# EAGLE board pre_amplifier (EAGLE 9.3.0)
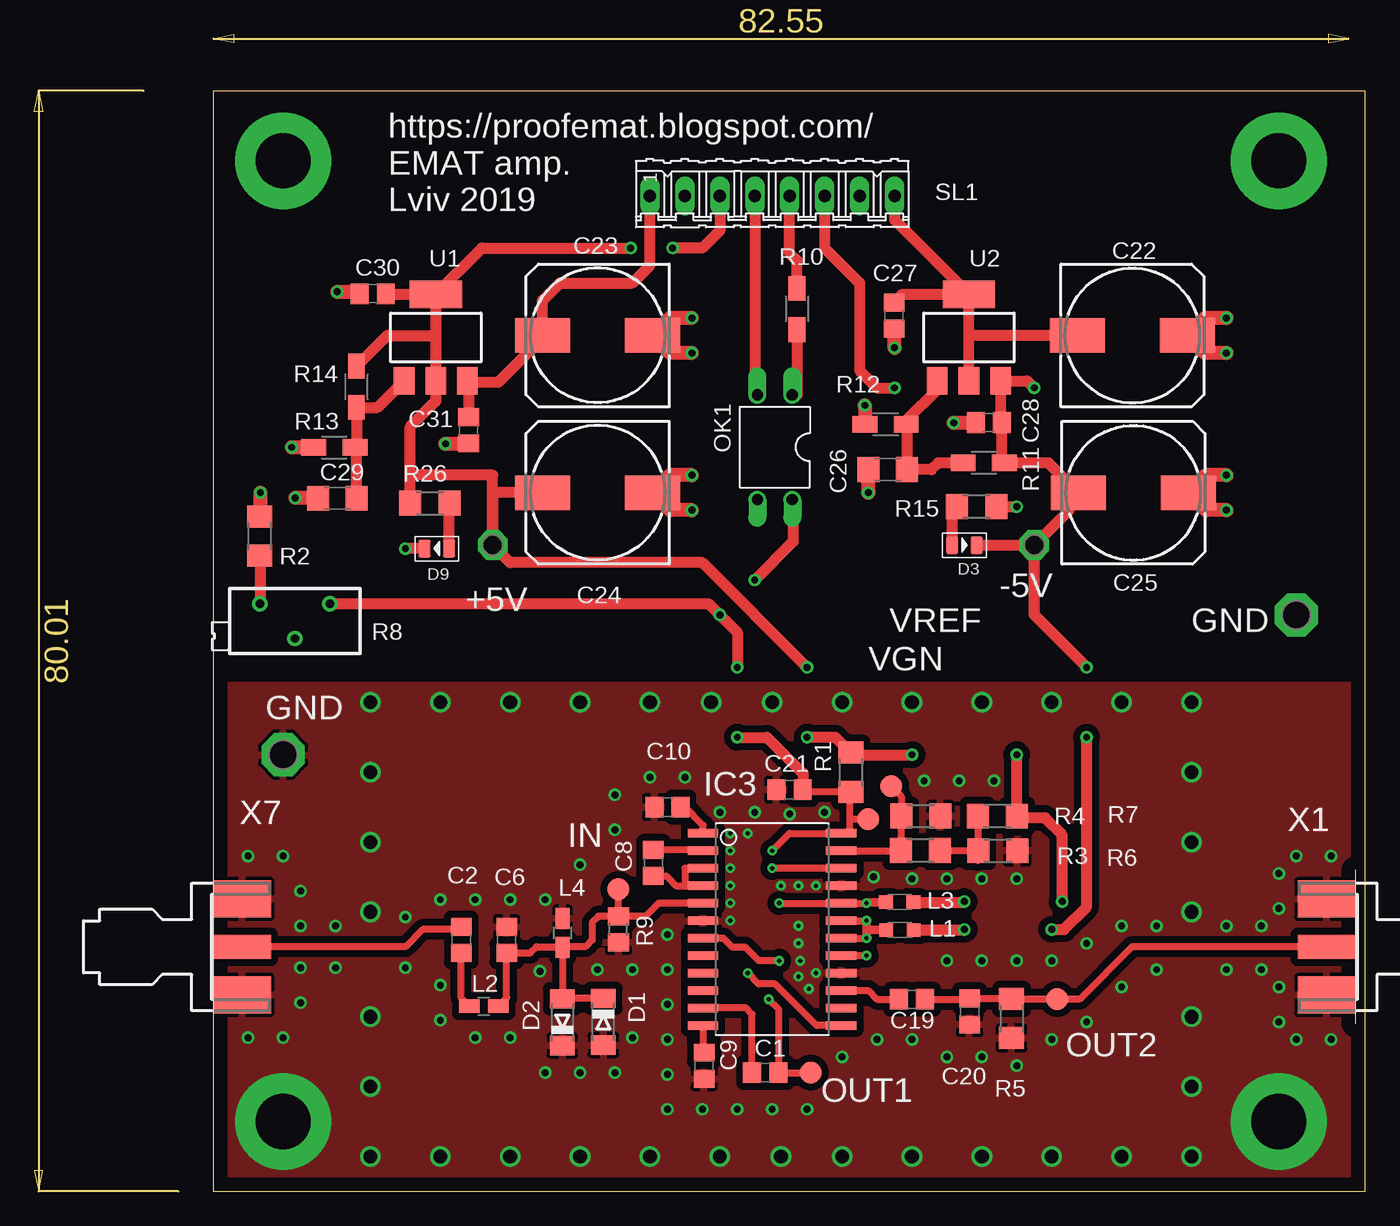
[diagram p0: board, top side]
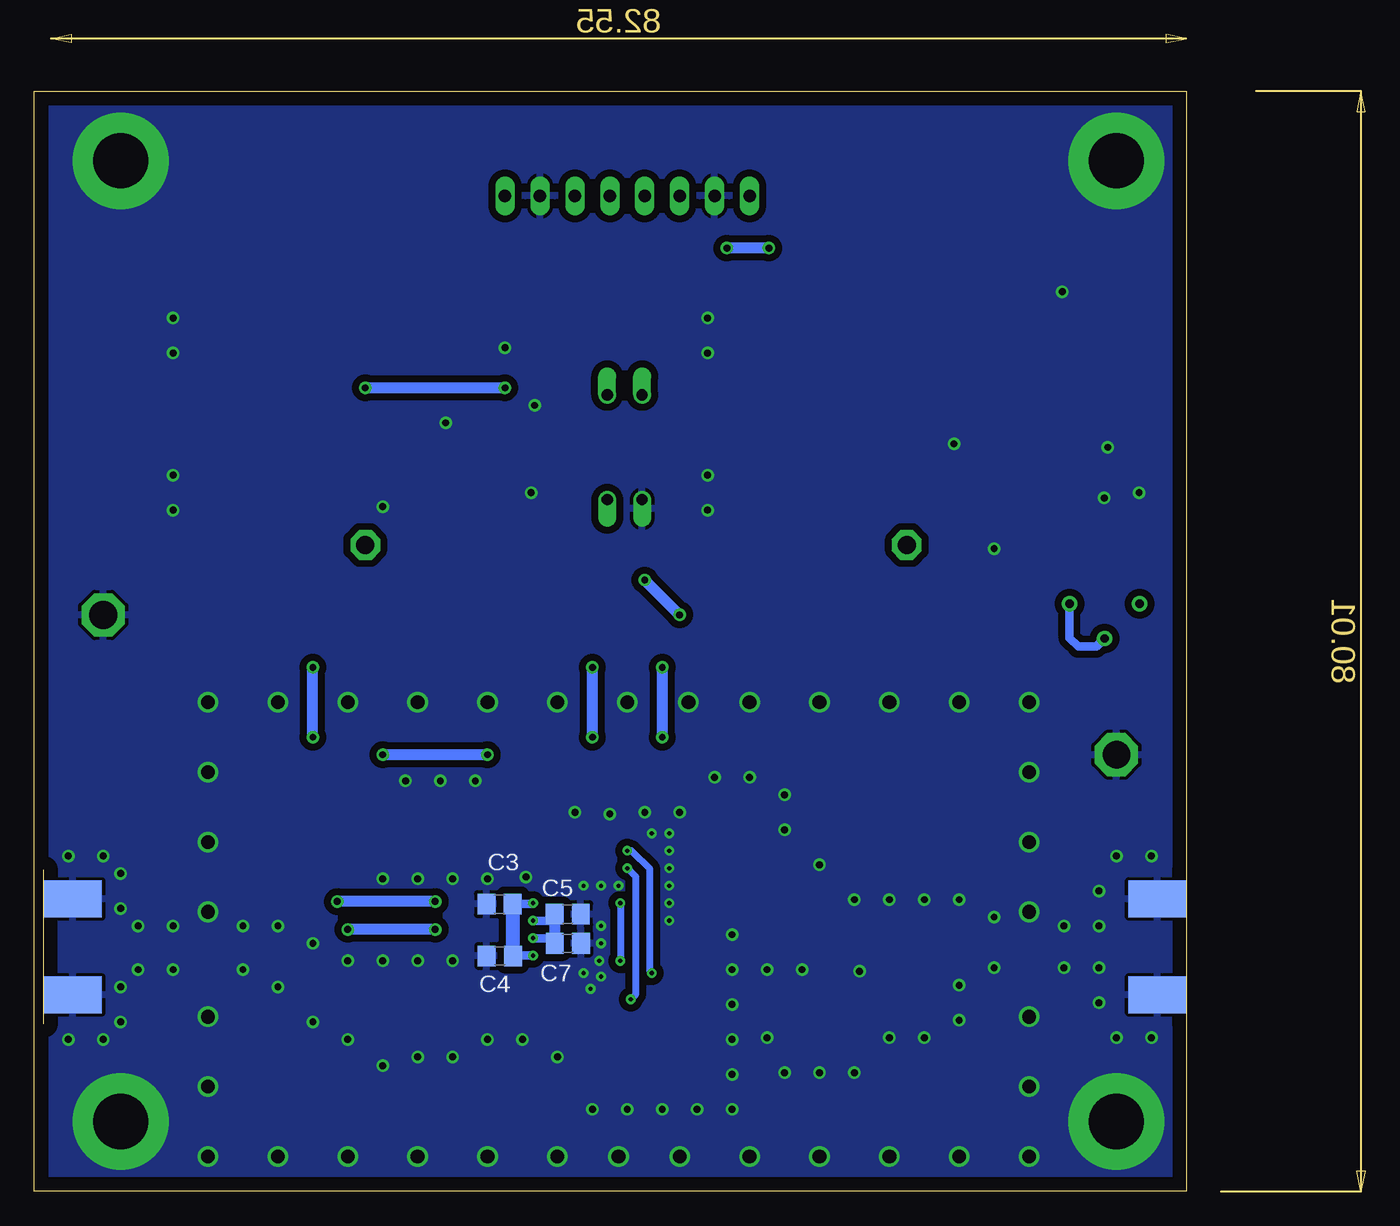
[diagram p1: board, bottom side, seen from below]

Size 83.74 x 80 mm. Coordinates in mm from the lower left corner, seen from the top.
Outline: 0,0 83.74,0 83.74,80 0,80 0,0
Copper layers (1*16): Top 0.035mm / dielectric 1.5mm / Bottom 0.035mm
Design rules "default *": minimum track width 0.3mm, minimum drill 10mil, track to track 8mil, track to pad 8mil, pad to pad 8mil, via to via 8mil, smd to smd 8mil, copper to edge 40mil, drill to drill 8mil, minimum pad ring 10mil, minimum via ring 8mil, stop-mask expansion 4mil, vias tented up to drill 0mil, thermal gap 10mil
Net classes: 0 default: width 0.3 mm, drill 0.3 mm, clearance 0.508 mm; 1 power: width 0.61 mm, drill 0.5 mm, clearance 0.508 mm to class 0, clearance 0.508 mm

## Footprints (pad centres in the part's own frame; a part is rotated, then mirrored left to right if it is on the bottom)
C0805 = smd 1.3 x 1.5: 1 -0.95,0; 2 0.95,0
153CLV-1010 = smd 4 x 2.5: + 4,0; - -4,0
C1206 = smd 1.6 x 1.8: 1 -1.4,0; 2 1.4,0
MINIMELF = smd 1.4 x 1.8: A 1.7,0; C -1.7,0
LED-0805 = smd 0.889 x 1.27: + -0.889,0; - 0.889,0
SO24L = smd 0.61 x 2.21: 1 -6.985,-5.029; 2 -5.715,-5.029; 3 -4.445,-5.029; 4 -3.175,-5.029; 5 -1.905,-5.029; 6 -0.635,-5.029; 7 0.635,-5.029; 8 1.905,-5.029; 9 3.175,-5.029; 10 4.445,-5.029; 11 5.715,-5.029; 12 6.985,-5.029; 13 6.985,5.029; 14 5.715,5.029; 15 4.445,5.029; 16 3.175,5.029; 17 1.905,5.029; 18 0.635,5.029; 19 -0.635,5.029; 20 -1.905,5.029; 21 -3.175,5.029; 22 -4.445,5.029; 23 -5.715,5.029; 24 -6.985,5.029
L2012C = smd 1 x 1: 1 -1,0; 2 1,0
L0805W = smd 1.5 x 1: 1 -1.052,0; 2 1.052,0
DIL04 = drill 0.813 offset: 1 -1.27,-3.81; 2 1.27,-3.81; 3 1.27,3.81; 4 -1.27,3.81
R1206 = smd 1.6 x 1.803: 1 -1.422,0; 2 1.422,0
RTRIMT93XB = drill 0.61: 1 1.27,-2.54; 2 -1.27,0; 3 1.27,2.54
R0805 = smd 1.3 x 1.5: 1 -0.95,0; 2 0.95,0
R1206W = smd 1.8 x 1.2: 1 -1.499,0; 2 1.499,0
08P = drill 0.914 long: 1 -8.89,0; 2 -6.35,0; 3 -3.81,0; 4 -1.27,0; 5 1.27,0; 6 3.81,0; 7 6.35,0; 8 8.89,0
P1-13 = drill 1.321 pad 2.159 octagon: TP 0,0
TP16R = smd 1.6 x 1.6: TP 0,0
P1-20 = drill 2.007 pad 3.15 octagon: TP 0,0
SOT223 = smd 1.5 x 2: 1 -2.3,-3.15; 2 0,-3.15; 3 2.3,-3.15 | smd 3.8 x 2: 4 0,3.15
J502-ND-142-0711-821/826 = smd 4.191 x 1.778: 1 2.115,0 | smd 4.191 x 2.667: G@1 2.115,3.495; G@2 2.115,-3.495 | smd 4.191 x 2.667 bottom: G@3 2.115,3.495; G@4 2.115,-3.495

## Placement (x,y rotation side)
C1  100nF  [C0805]  40.13,8.64 0 top
C2  2.4nF  [C0805]  18.03,18.29 270 top
C3  100nF  [C0805]  49.93,20.89 180 bottom
C4  100nF  [C0805]  49.91,17.12 180 bottom
C5  100nF  [C0805]  44.97,20.16 180 bottom
C6  12nF  [C0805]  21.34,18.29 270 top
C7  100nF  [C0805]  44.96,18.03 180 bottom
C8  100nF  [C0805]  32,23.88 270 top
C9  100nF  [C0805]  35.69,9.14 270 top
C10  100nF  [C0805]  33.02,27.94 0 top
C19  100nF  [C0805]  50.8,13.97 180 top
C20  5pF  [C0805]  54.99,13.08 270 top
C21  100pF  [C0805]  41.91,29.21 180 top
C22  220uF 16V  [153CLV-1010]  66.83,62.23 0 top
C23  220uF 16V  [153CLV-1010]  27.94,62.23 180 top
C24  470uF 6.3V  [153CLV-1010]  27.94,50.8 180 top
C25  470uF 6.3V  [153CLV-1010]  66.9,50.8 0 top
C26  10uF  [C1206]  49.04,52.48 180 top
C27  100nF  [C0805]  49.5,63.67 270 top
C28  1uF  [C0805]  56.39,55.89 180 top
C29  10uF  [C1206]  9.03,50.39 0 top
C30  1uF  [C0805]  11.6,65.27 0 top
C31  100nF  [C0805]  18.57,55.34 90 top
D1  1N4148  [MINIMELF]  28.37,12.33 270 top
D2  1N4148  [MINIMELF]  25.39,12.3 90 top
D3  -5V  [LED-0805]  54.61,46.99 0 top
D9  +5V  [LED-0805]  16.26,46.74 180 top
IC3  [SO24L]  40.64,19.05 270 top
L1  BLM21PG221SN1D  [L2012C]  49.93,19 180 top
L2  10uH  [L0805W]  19.67,13.47 0 top
L3  BLM21PG221SN1D  [L2012C]  49.91,21.03 180 top
L4  2.2uH  [L0805W]  25.4,18.8 90 top
OK1  PC817  [DIL04]  40.83,54.11 180 top
R1  20K  [R1206]  46.35,30.48 90 top
R2  1K  [R1206]  3.39,47.64 270 top
R3  5.1K  [R1206]  51.42,24.78 0 top
R4  47K  [R1206]  51.45,27.3 180 top
R5  510  [R1206]  58.04,12.57 90 top
R6  10K  [R1206]  57.04,24.78 180 top
R7  5.1K  [R1206]  57.01,27.28 0 top
R8  20K  [RTRIMT93XB]  5.95,41.47 90 top
R9  51  [R0805]  29.46,19.05 90 top
R10  510  [R1206W]  42.44,64.15 270 top
R11  240  [R1206W]  56.02,52.97 180 top
R12  720  [R1206W]  48.88,55.77 180 top
R13  720  [R1206W]  8.81,54.09 0 top
R14  240  [R1206W]  10.43,58.5 90 top
R15  1K  [R1206]  55.5,49.78 0 top
R26  1K  [R1206]  15.75,50.04 180 top
SL1  [08P]  40.64,72.39 0 top
TP1  TPSQPAD1-13  [P1-13]  20.32,46.99 180 top
TP2  TPSQPAD1-13  [P1-13]  59.69,46.99 0 top
TP3  TPSQTP16R  [TP16R]  47.62,27.05 0 top
TP4  TPSQTP16R  [TP16R]  49.28,29.46 0 top
TP5  TPSQTP16R  [TP16R]  43.43,8.64 0 top
TP6  TPSQTP16R  [TP16R]  61.34,13.97 0 top
TP7  TPSQTP16R  [TP16R]  29.46,21.97 180 top
TP8  TPSQPAD1-20  [P1-20]  78.74,41.91 0 top
TP9  TPSQPAD1-20  [P1-20]  5.08,31.75 0 top
U1  LM317DCY  [SOT223]  16.18,62.08 0 top
U2  LM337IMP  [SOT223]  54.94,62.08 0 top
X1  SMA-142-0711-821/826  [J502-ND-142-0711-821/826]  83.06,17.78 180 top
X7  SMA-142-0711-821/826  [J502-ND-142-0711-821/826]  0,17.78 0 top

## Library data of the parts
C1-C10 C19-C21 C27 C28 C30 C31 R1-R7 R9-R15 R26 = resistor
C22-C25 = rcl; SPICEPREFIX: C
C26 C29 = resistor; PACKAGE: 1206
D1 D2 = diode
D3 D9 = Seeed-LED; MPN: 17-215SYGC/S530-E2/TR8
IC3 = burr-brown; MF: TEXAS INSTRUMENTS; MPN: ADS1213U; OC_FARNELL: 1234905; OC_NEWARK: 35C1517
L1 L3 = rcl; SPICEPREFIX: L
L2 L4 = rcl
OK1 = optocoupler; MPN: PC817X4J000F; OC_FARNELL: 9707727; OC_NEWARK: 97K7059
R8 = rcl; SPICEMODEL: X; SPICEPREFIXL: POT
SL1 = con-amp-quick; OC_FARNELL: unknown; OC_NEWARK: unknown
TP1 = testpad; TP_SIGNAL_NAME: +5V
TP2 = testpad; TP_SIGNAL_NAME: -5V
TP3 = testpad; TP_SIGNAL_NAME: VGN
TP4 = testpad; TP_SIGNAL_NAME: VREF
TP5 = testpad; TP_SIGNAL_NAME: OUT1
TP6 = testpad; TP_SIGNAL_NAME: OUT2
TP7 = testpad; TP_SIGNAL_NAME: IN
TP8 TP9 = testpad; TP_SIGNAL_NAME: GND
U1 U2 = modified-v-reg
X1 X7 = con-coax; MF: JOHNSON COMPONENTS; MPN: 142-0711-821; OC_FARNELL: 1019328; OC_NEWARK: 16F3627

## Nets
+5V: C24.+ C30.2 L3.1 R1.2 R7.2 R14.2 R26.2 SL1.3 TP1.TP U1.2 U1.4
+9V [power]: C23.+ C31.2 SL1.1 U1.3
-5V: C25.- C28.1 D3.- L1.1 R11.1 SL1.6 TP2.TP U2.3
-9V [power]: C22.- C27.1 SL1.8 U2.2 U2.4
GND [power]: C3.2 C4.2 C5.1 C6.1 C7.1 C9.2 C10.1 C20.2 C21.2 C22.+ C23.- C24.- C25.+ C26.2 C27.2 C28.2 C29.1 C30.1 C31.1 D1.A D2.C D9.- IC3.6 IC3.16 IC3.21 L4.2 OK1.3 R2.1 R4.1 R5.1 R6.1 R9.1 R12.2 R13.1 R15.2 SL1.2 SL1.7 TP8.TP TP9.TP X1.G@1 X1.G@2 X1.G@3 X1.G@4 X7.G@1 X7.G@2 X7.G@3 X7.G@4
N$1: C21.1 IC3.13 IC3.24 OK1.4 R1.1 R8.1 R8.2 TP3.TP
N$2: C9.1 IC3.12
N$3: C6.2 D1.C D2.A IC3.5 L2.2 L4.1 R9.2 TP7.TP
N$4: C19.1 C20.1 R5.2 TP6.TP X1.1
N$5: IC3.23 R3.1 R4.2 TP4.TP
N$6: C1.2 IC3.22 TP5.TP
N$7: C8.2 IC3.3 IC3.4
N$8: C1.1 IC3.11
N$9: C8.1 IC3.2
N$10: C2.1 X7.1
N$11: R2.2 R8.3
N$12: R3.2 R6.2 R7.1
N$13: C26.1 R11.2 R12.1 U2.1
N$14: C10.2 IC3.1
N$15: C2.2 L2.1
N$16: C29.2 R13.2 R14.1 U1.1
N$17: OK1.1 R10.2
N$18: C19.2 IC3.15
N$19: R10.1 SL1.5
N$20: OK1.2 SL1.4
N$21: D3.+ R15.1
N$27: D9.+ R26.1
V+: C3.1 C4.1 IC3.7 IC3.17 IC3.20 L3.2
V-: C5.2 C7.2 IC3.18 IC3.19 L1.2

## Tracks (layer width: path | path; a pad name or v marks a point on that pad's centre or on a via)
+5V  (via drill 0.5)
  Top 0.8: v50.8,31.75 46.51,31.75 R1.2 45.24,33.02 v43.18,33.02 | R7.2 58.55,27.16 | v58.42,31.75 58.42,27.16 58.55,27.16 | L3.1 54.56,21.03 v54.61,21.08 | v61.72,21.08 61.72,25.91 60.47,27.16 58.55,27.16 | C24.+ 20.32,50.8 TP1.TP | R26.2 14.33,52.07 | 14.33,52.07 14.33,55.6 16.18,57.45 U1.2 16.18,62.23 | TP1.TP 20.32,52.07 14.33,52.07 | U1.4 16.18,62.23 | R14.2 12.66,62.23 16.18,62.23 | U1.4 19.53,68.58 v30.35,68.58 | SL1.3 36.83,69.85 35.56,68.58 v33.4,68.58 | v43.18,38.1 35.56,45.72 21.59,45.72 TP1.TP | C30.2 12.59,65.23 U1.4
  Bottom 0.8: v50.8,31.75 v58.42,31.75 | v54.61,21.08 v61.72,21.08 | v30.35,68.58 v33.4,68.58 | v43.18,33.02 v43.18,38.1
+9V
  Top 0.8: U1.3 18.57,58.84 | 18.57,58.84 C31.2 | 18.57,58.84 20.74,58.84 23.94,62.04 C23.+ 23.94,64.77 25.21,66.04 30.48,66.04 31.75,67.31 SL1.1
-5V  (via drill 0.5)
  Top 0.8: L1.1 54.56,19 v54.61,19.05 | v60.96,19.05 61.85,19.05 63.5,20.7 v63.5,33.02 | 57.34,55.69 C28.1 | D3.- TP2.TP | TP2.TP 62.23,49.53 62.23,50.8 C25.- 60.73,52.97 R11.1 57.34,53.15 57.34,55.69 | v63.5,38.1 59.69,41.91 TP2.TP | 57.34,55.69 57.24,55.79 U2.3 59.18,58.93 v59.69,58.42 | SL1.6 44.45,68.58 46.99,66.04 46.99,59.69 48.26,58.42 v49.53,58.42
  Bottom 0.8: v54.61,19.05 v60.96,19.05 | v63.5,33.02 v63.5,38.1 | v49.53,58.42 v59.69,58.42
-9V
  Top 0.8: SL1.8 49.53,70.64 U2.4 | C27.1 50.1,65.23 U2.4 | U2.2 54.94,62.23 | 54.94,62.23 U2.4 | C22.- 54.94,62.23
GND  (via drill 0.3, 0.5, 1, 4 pad 7)
  Top 0.8: R15.2 v58.42,49.78 | D9.- v13.97,46.74
  Top 1: v73.66,49.53 72.17,49.53 C25.+ 72.17,52.07 v73.66,52.07 | v47.62,50.8 47.64,50.81 C26.2 | v47.37,57.15 R12.2 | v53.85,55.88 55.43,55.88 C28.2 | v49.53,61.34 49.53,62.7 C27.2 | v34.8,63.5 33.21,63.5 C23.- 33.21,60.96 v34.8,60.96 | v73.66,60.96 72.1,60.96 C22.+ 72.1,63.5 v73.66,63.5 | v34.8,52.07 33.21,52.07 C24.- 33.21,49.53 v34.8,49.53 | v9.02,65.41 10.51,65.41 C30.1 | v5.71,54.1 7.3,54.1 R13.1 | v16.89,54.36 18.54,54.36 C31.1 | C29.1 7.6,50.42 v5.97,50.42 | v3.43,50.8 3.43,49.1 R2.1
  other vias: 5.08,74.93 5.08,5.08 77.47,5.08 43.81,15.88 43.31,14.73 42.55,18.03 42.55,19.3 42.67,16.76 43.81,22.23 41.27,22.23 42.55,22.23 37.59,19.68 42.55,15.62 37.59,20.95 37.59,22.23 37.59,23.5 37.59,24.77 37.59,26.04 38.86,26.04 48.01,22.86 50.8,22.73 53.34,22.73 55.88,22.73 58.42,22.73 58.42,16.76 55.88,16.76 53.34,16.76 60.96,16.76 63.5,18.03 66.04,19.3 68.58,19.3 73.66,19.3 76.2,19.3 76.2,16.13 73.66,16.13 68.58,16.13 66.04,14.86 63.5,12.32 60.96,11.05 58.42,9.14 55.88,9.78 53.34,9.78 50.8,11.05 48.26,11.05 45.72,9.78 43.18,5.97 40.64,5.97 38.1,5.97 35.56,5.97 33.02,5.97 33.02,8.51 33.02,11.05 33.02,13.59 33.02,16.13 33.02,18.67 30.48,16.13 27.94,16.13 56.77,29.84 54.23,29.84 51.69,29.84 44.45,27.56 41.91,27.43 36.83,27.56 39.37,27.56 34.29,30.1 31.75,30.1 29.21,28.83 29.21,26.29 26.67,23.75 24.13,21.21 21.59,21.21 19.05,21.21 16.51,21.21 13.97,19.94 8.89,19.3 6.35,19.3 6.35,16.26 8.89,16.26 13.97,16.26 16.51,14.99 16.51,12.45 19.05,11.18 21.59,11.18 24.13,8.64 26.67,8.64 29.21,8.64 30.48,11.18 23.75,16 6.35,21.84 5.08,24.38 2.54,24.38 6.35,13.72 5.08,11.18 2.54,11.18 77.47,20.57 77.47,23.11 78.74,24.38 81.28,24.38 77.47,14.86 77.47,12.32 78.74,11.05 81.28,11.05 11.43,2.54 16.51,2.54 21.59,2.54 26.67,2.54 71.12,2.54 66.04,2.54 60.96,2.54 55.88,2.54 50.8,2.54 45.72,2.54 36.83,2.54 31.75,2.54 41.27,2.54 11.43,7.62 11.43,12.7 11.43,35.56 11.43,30.48 11.43,25.4 11.43,20.32 16.51,35.56 21.59,35.56 26.67,35.56 31.75,35.56 36.2,35.56 71.12,35.56 66.04,35.56 60.96,35.56 55.88,35.56 50.8,35.56 45.72,35.56 40.64,35.56 71.12,7.62 71.12,12.7 71.12,30.48 71.12,25.4 71.12,20.32 77.47,74.93
  pour Bottom (isolate 0.3): 0,0 0,80.01 82.93,80.01 82.93,0
  pour Top (isolate 0.3): 0,0.13 0,36.83 82.93,36.83 82.93,0.13
N$1  (via drill 0.3, 0.5)
  Top 0.5: v38.86,15.88 39.66,15.08 40.85,15.08 43.86,12.06 IC3.13 | v40.64,24.77 41.91,26.04 IC3.24 46.3,26.04 46.3,27.05 | C21.1 42.88,29.18 43.01,29.06 R1.1 46.3,29.01 46.3,27.05 | TP3.TP 46.3,27.05
  Top 0.8: R8.1 36,42.74 v36.83,41.91 38.1,40.64 v38.1,38.1 | v39.37,44.45 42.16,47.24 42.16,50.24 OK1.4 | v38.1,33.02 40.26,33.02 42.88,30.39 42.88,29.18
  Bottom 0.5: v40.64,24.77 40.34,24.77 39.01,23.43 39.01,16.02 v38.86,15.88
  Bottom 0.6: R8.2 6.54,39.6 7.85,39.6 8.48,40.23 R8.1
  Bottom 0.8: v36.83,41.91 v39.37,44.45 | v38.1,38.1 v38.1,33.02
N$2
  Top 0.5: C9.1 35.61,10.17 IC3.12
N$3
  Top 0.5: IC3.5 32.38,20.95 31.43,20 R9.2 | 25.44,17.78 L4.1 25.4,14.05 25.42,14.03 | 25.44,17.78 27.05,17.78 27.56,18.29 27.56,19.56 28,20 R9.2 | R9.2 TP7.TP | D1.C 25.42,14.03 | 25.42,14.03 D2.A | 25.44,17.78 23.5,17.78 23.05,17.34 C6.2 21.34,14.09 L2.2
N$4
  Top 0.5: C19.1 54.93,13.97 C20.1 58,14.03 R5.2 61.32,13.99 TP6.TP 62.99,13.97 66.8,17.78 X1.1
N$5
  Top 0.5: IC3.23 49.98,24.77 R3.1 50.03,24.81 R4.2 50.03,28.71 TP4.TP
N$6  (via drill 0.3)
  Top 0.5: IC3.22 v40.64,23.5 | v40.39,13.97 41.08,13.27 C1.2 TP5.TP
  Bottom 0.5: v40.39,13.97 40.01,14.34 40.01,22.87 v40.64,23.5
N$7
  Top 0.5: C8.2 32.95,22.93 33.66,22.23 34.29,22.23 | 34.29,22.23 IC3.4 | IC3.3 34.29,23.5 34.29,22.23
N$8
  Top 0.5: C1.1 39.18,12.89 38.73,13.34 IC3.11
N$9
  Top 0.5: IC3.2 35.55,24.83 C8.1
N$10
  Top 0.5: C2.1 17.85,19.05 15.24,19.05 13.97,17.78 X7.1
N$11
  Top 0.8: R2.2 3.4,46.2 R8.3
N$12
  Top 0.5: R3.2 54.85,24.78 55.59,24.04 55.59,24.81 | R7.1 55.59,24.81 | 55.59,24.81 R6.2
N$13
  Top 0.8: U2.1 52.64,58.29 50.38,56.03 R12.1 50.44,55.7 C26.1 52.22,52.48 52.71,52.97 R11.2
N$14
  Top 0.5: IC3.1 35.61,26.62 34.29,27.94 C10.2
N$15
  Top 0.5: L2.1 18.03,14.06 C2.2
N$16
  Top 0.8: U1.1 11.95,57 R14.1 10.43,54.21 | 10.43,54.21 R13.2 | C29.2 10.43,54.2 10.43,54.21
N$17
  Top 0.8: R10.2 42.44,57.92 OK1.1
N$18
  Top 0.5: IC3.15 47.62,14.61 48.26,13.97 C19.2
N$19
  Top 0.8: SL1.5 41.91,68.19 42.44,67.66 R10.1
N$20
  Top 0.8: SL1.4 39.37,57.92 OK1.2
N$21
  Top 0.8: R15.1 53.72,49.43 D3.+
N$27
  Top 0.8: D9.+ 17.14,50.01 R26.1
V+  (via drill 0.3)
  Top 0.5: IC3.17 v47.5,17.14 | v47.5,20.95 IC3.20 v41.15,20.95 | v41.15,16.76 39.67,16.76 38.69,17.75 37.75,17.75 37.08,18.41 IC3.7
  Top 0.6: L3.2 47.57,21.03 v47.5,20.95
  Bottom 0.5: v41.15,20.95 v41.15,16.76
  Bottom 0.6: C4.1 48.93,17.14 v47.5,17.14 | C3.1 47.56,20.89 v47.5,20.95
  Bottom 1: C3.1 48.98,17.14 C4.1
V-  (via drill 0.3)
  Top 0.5: IC3.18 v47.5,18.41 | IC3.19 v47.5,19.68
  Top 0.6: v47.5,18.41 47.5,19.05 | 47.5,19.05 v47.5,19.68 | L1.2 47.55,19 47.5,19.05
  Bottom 0.5: 45.92,18.05 C7.2
  Bottom 0.6: v47.5,18.41 46.29,18.41 C7.2 | v47.5,19.68 46.4,19.68 C5.2
  Bottom 0.8: C5.2 45.92,18.05

## Text on the board
tPlace: https://proofemat.blogspot.com/ / EMAT amp. / Lviv 2019